# Altium PCB PCB1.PcbDoc
Units mil, origin at the board's own origin, x right, y up, seen from the top; angles counter-clockwise.
Board outline 3149.61 x 3937.01 mil, 2 copper layers (Top Layer, Bottom Layer); 90 components, 52 nets, 276 pads, 678 vias.
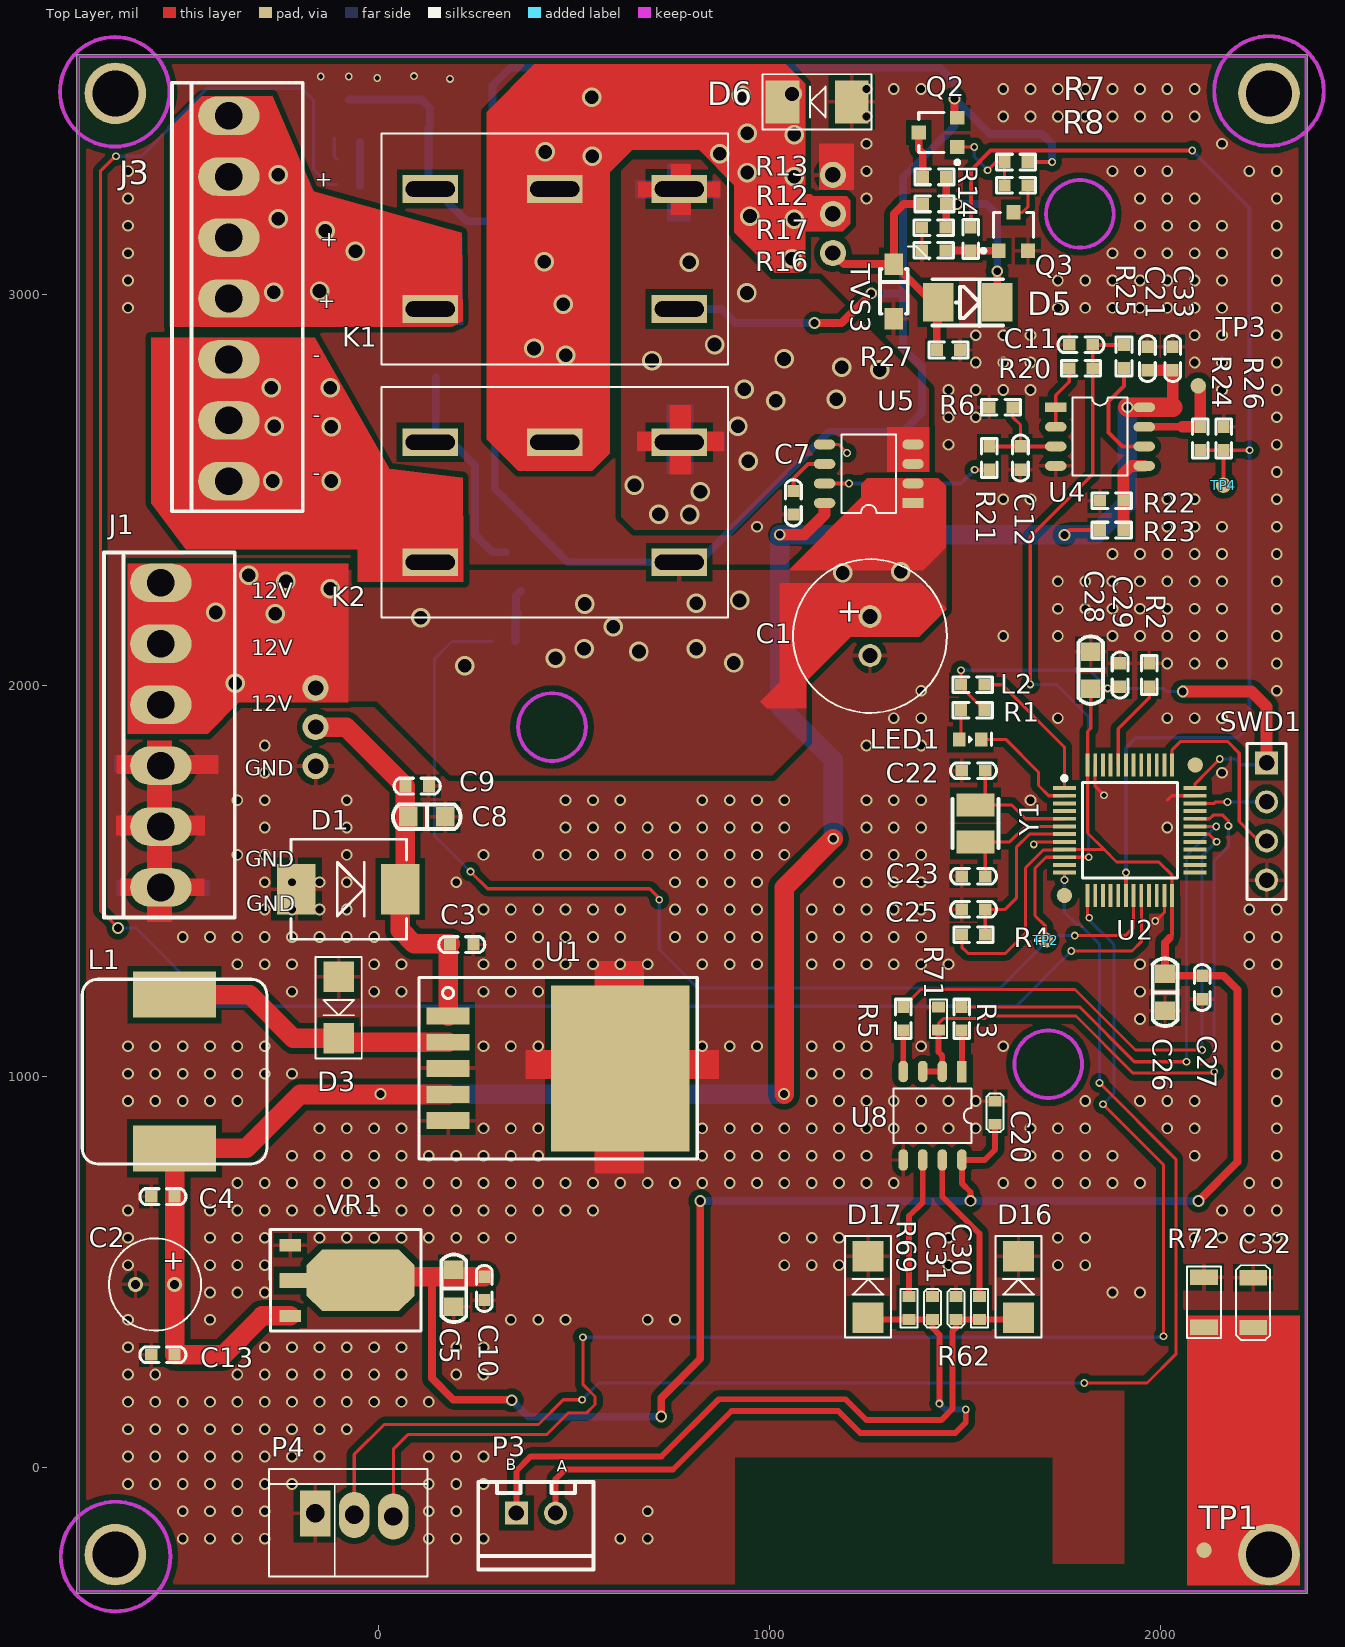
[diagram p0: Top Layer view]
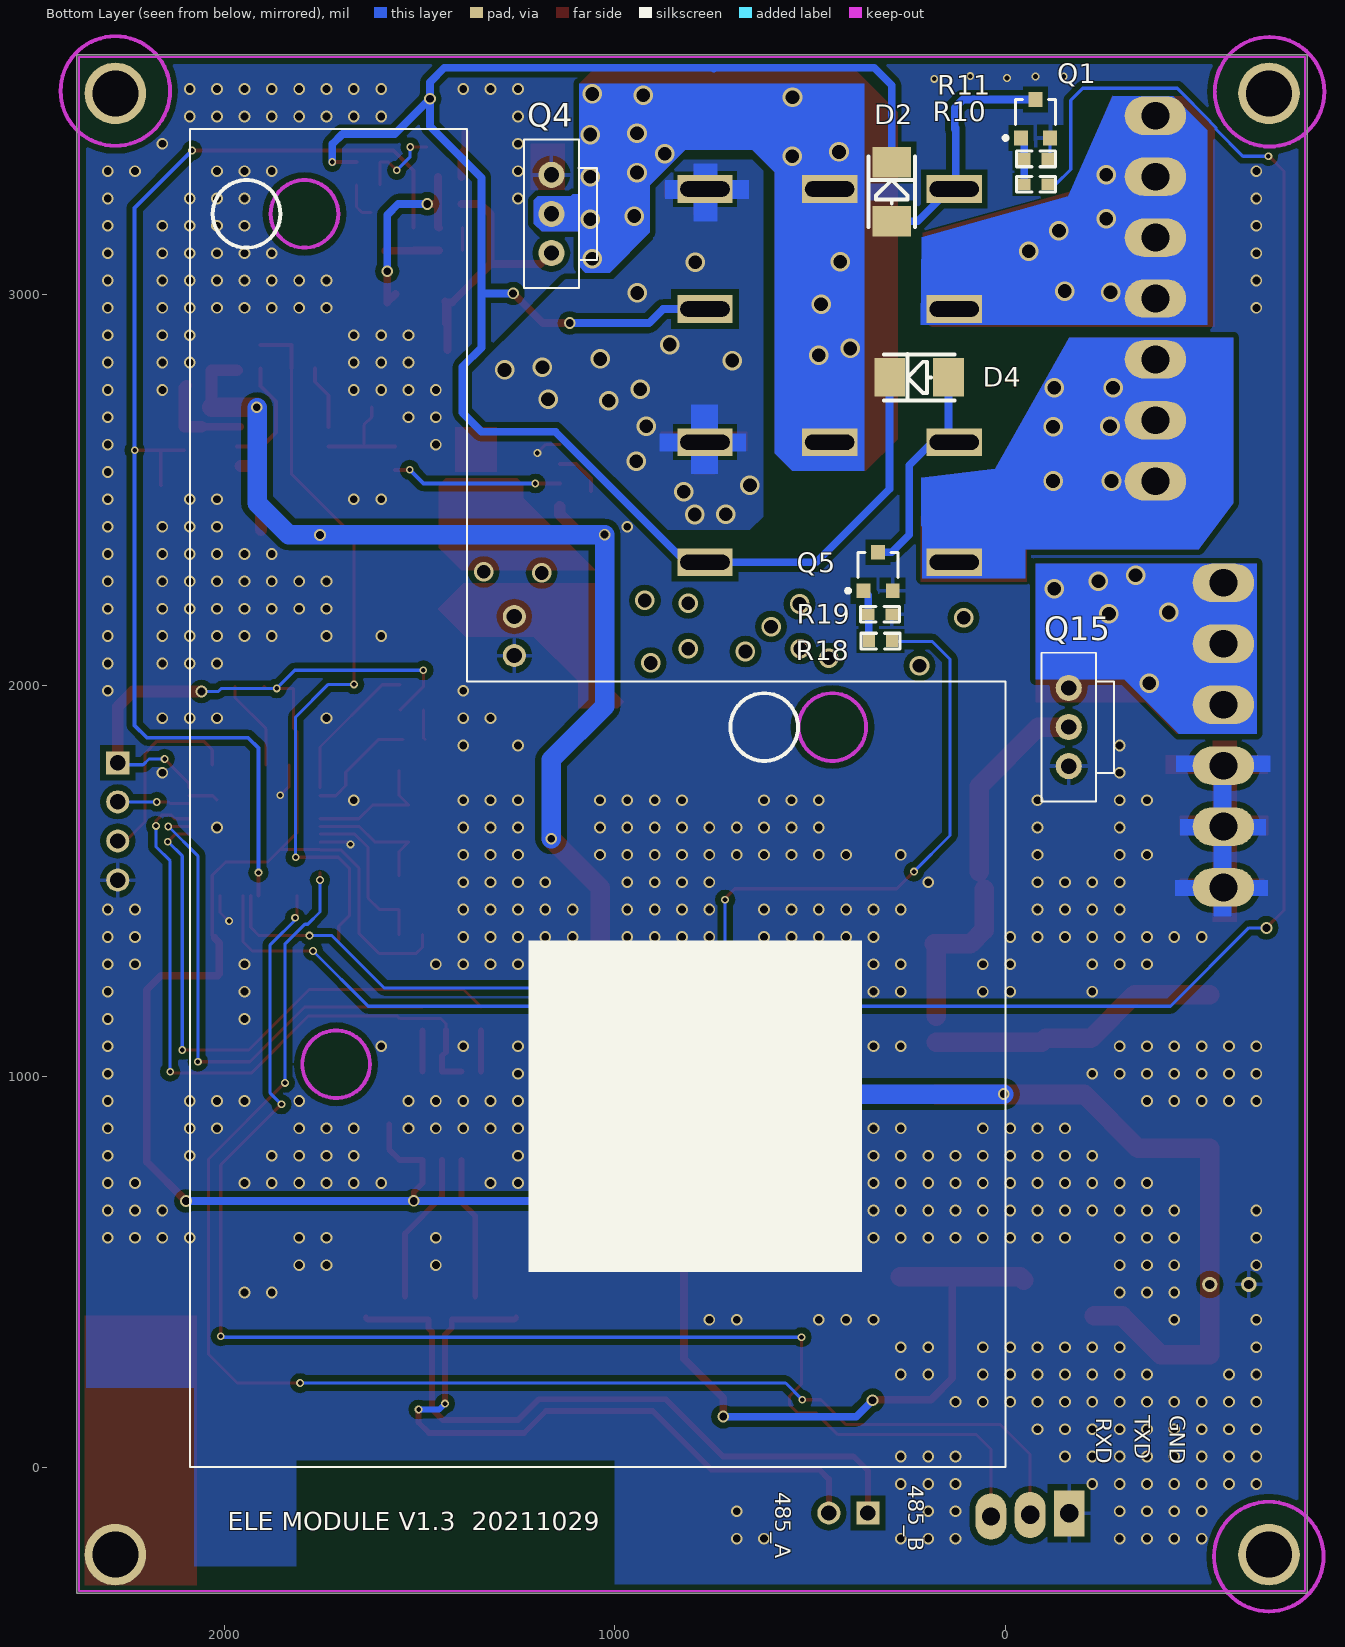
[diagram p1: Bottom Layer view, seen from below]
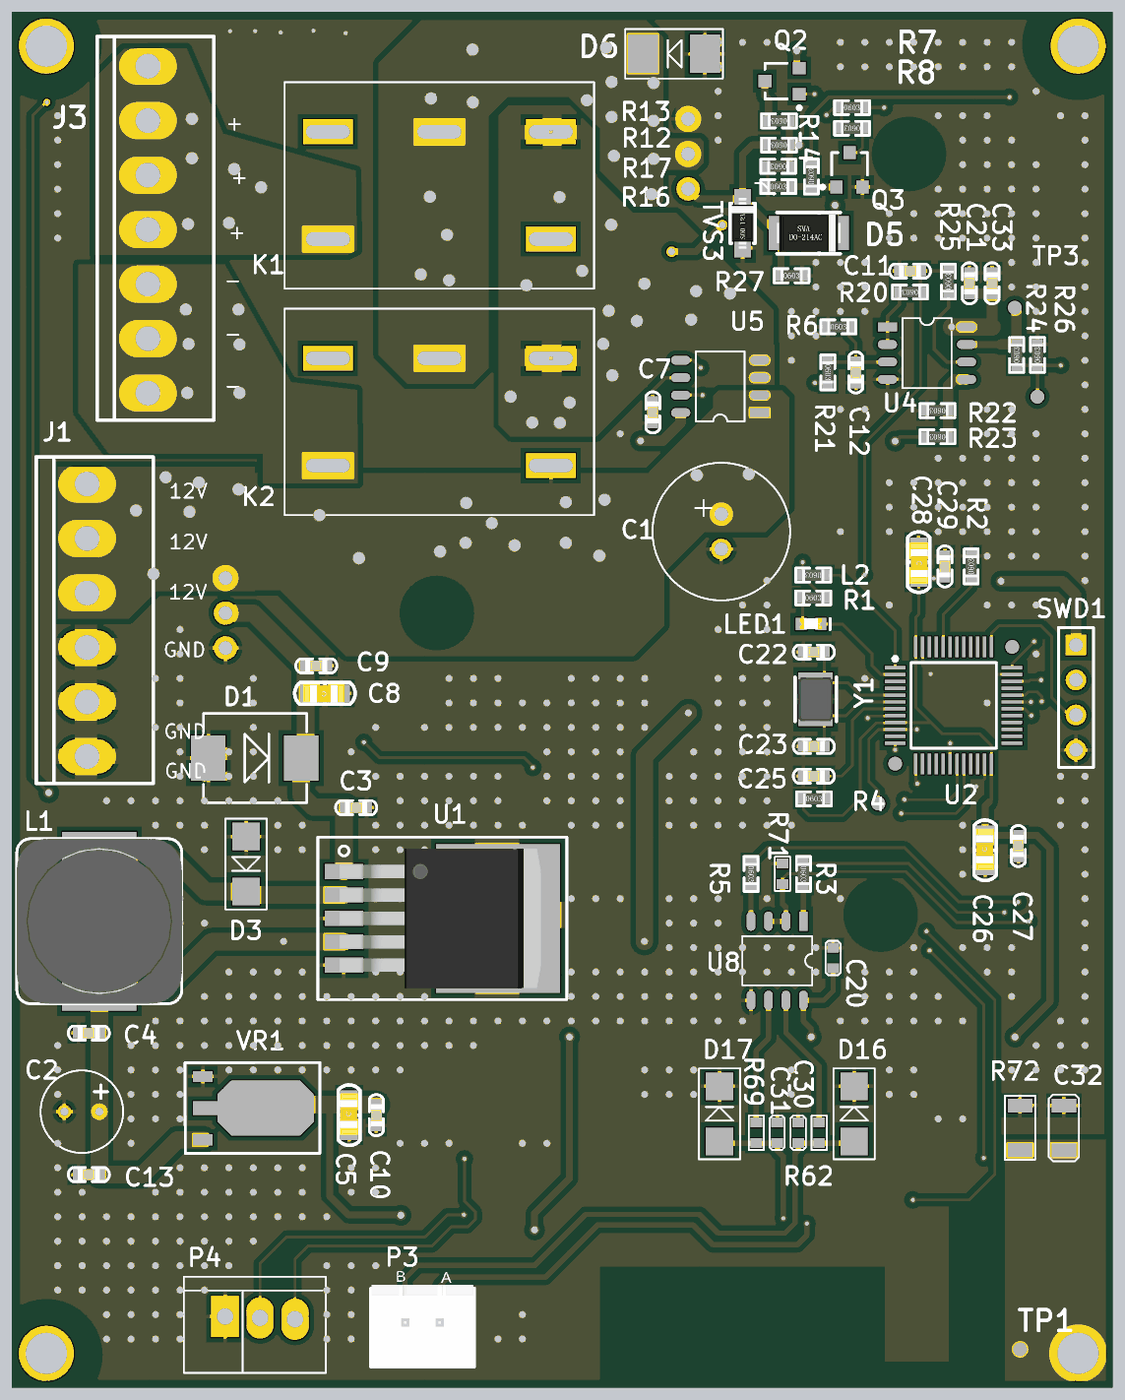
[diagram p2: 3D render of the assembled board from above, using the file's embedded part models]
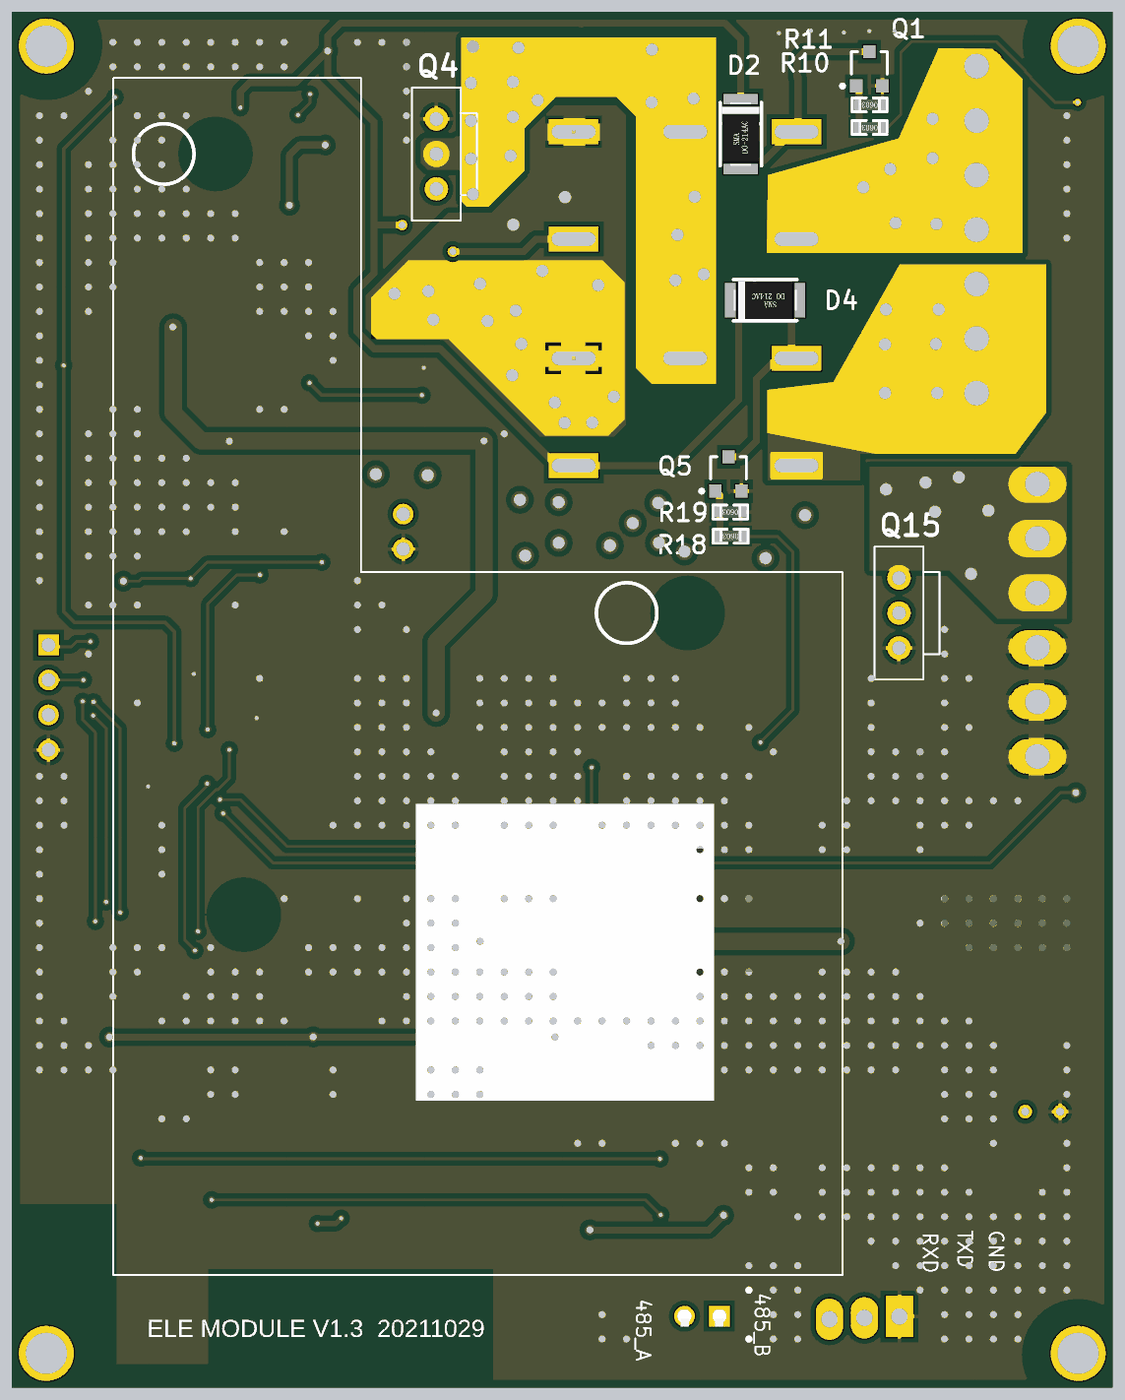
[diagram p3: 3D render of the assembled board from below, using the file's embedded part models]

## Layer stack, top to bottom
Top Solder: solder mask 0.4, Solder Resist, Dk 3.5
Top Layer: signal copper 1.4
Dielectric1: dielectric 12.6, FR-4, Dk 4.8
Bottom Layer: signal copper 1.4
Bottom Solder: solder mask 0.4, Solder Resist, Dk 3.5

## Board outline
-773,-322.62 -773,3614.39 2376.61,3614.39 2376.61,-322.62

## Design rules (kind name [scope] priority, off if disabled: settings)
Clearance gnd [All] p1: gap=15
Clearance [All] p2: gap=10
DiffPairsRouting [All] p1: maxlimit=10 minlimit=10 mostfreqgap=10 toplayer_minwidth=15 toplayer_maxwidth=15 toplayer_prefwidth=15 bottomlayer_minwidth=15 bottomlayer_maxwidth=15 bottomlayer_prefwidth=15 maxuncoupledlength=500
MinimumSolderMaskSliver [All] p1: minsoldermaskwidth=1
PolygonConnect PolygonConnect_1 [isvia] p1: connectstyle=Direct reliefconductorwidth=10 reliefentries=4 polygonreliefangle="90 Angle" airgapwidth=10
PolygonConnect [All] p2: connectstyle=Relief reliefconductorwidth=10 reliefentries=4 polygonreliefangle="90 Angle" airgapwidth=10
RoutingVias [All] p1: holewidth=28 width=50 viastyle="Through Hole" minholewidth=28 minwidth=50 maxholewidth=28 maxwidth=50
SilkToSolderMaskClearance [IsPad] p1: minsilkscreentomaskgap=1 clearancetoexposedcopper=TRUE
SolderMaskExpansion [All] p1: expansion=4
Width [All] p1: maxlimit=500 minlimit=5 preferedwidth=10
27 further rules are at their usual default settings.

## Classes and differential pairs
component class com: C20 C30 C31 C32 D16 D17 P3 P4 R62 R69 R71 R72 TP1 U8
component class 07_EL_CON: C7 C11 C12 C21 C33 C? D2 D4 D5 D6 J3 K1 K2 Q1 Q2 Q3 Q4 Q5 R6 R7 R8 R10 R11 R12 R13 R14 R16 R17 R18 R19 R20 R21 R22 R23 R24 R25 R26 R27 R? TP2 TP3 TP4 TVS3 U4 U5 U?
component class 03_MCU: C22 C23 C25 C26 C27 C28 C29 L2 LED1 R1 R2 R3 R4 R5 SWD1 U2 Y1
component class 02_Power: C1 C2 C3 C4 C5 C8 C9 C10 C13 D1 D3 J1 L1 Q15 U1 VR1
differential pair 485: +485_P -485_N

## Components (designator, comment, footprint, x,y, rotation, side; value= is the part's Value field where it differs from the comment)
C1 "1000uF/35V" 10*16 1257,2127 r90 top
C2 "100uF/35V" 6*8 -573,467.38 r0 top
C3 "104 50V" SMD-0603C 212,1337.38 r180 top
C4 "104 50V" SMD-0603C -553,692.38 r0 top
C5 "10uF 25V" SMD-0805C 192,457.38 r90 top
C7 "104 50V" SMD-0603C 1061,2468 r270 top
C8 "10uF50V" SMD-0805C 122.63,1664.12 r180 top
C9 "104 50V" SMD-0603C 98,1743 r180 top
C10 "104 50V" SMD-0603C 269.68,457.37 r90 top
C11 "NC" SMD-0603C 1797,2872.38 r0 top
C12 "104 50V" SMD-0603C 1642,2582.38 r270 top
C13 "104 50V" SMD-0603C -553,287.38 r0 top
C20 "104 50V" 0603C 1577,877.38 r90 top
C21 "104 50V" SMD-0603C 1967,2837.38 r270 top
C22 "12P 50V" SMD-0603C 1522,1782.38 r180 top
C23 "12P 50V" SMD-0603C 1522,1512.38 r180 top
C25 "104 50V" SMD-0603C 1522,1427.38 r0 top
C26 "10uF 25V" SMD-0805C 2012,1215.13 r90 top
C27 "104 50V" SMD-0603C 2107,1227.38 r90 top
C28 "10uF 25V" SMD-0805C 1822,2039.62 r270 top
C29 "104 50V" SMD-0603C 1897,2027.38 r270 top
C30 "220PF/16V" 0603C 1477,377.38 r90 top
C31 "220PF/16V" 0603C 1417,377.38 r90 top
C32 "1NF/2KV" 1206C 2237.55,485.01 r270 top
C33 "104 50V" SMD-0603C 2032,2837.38 r270 top
D1 "SMCJ24CA" SMC -211,1479 r0 top
D2 "1N4007" DO-214-AC 291,3264 r90 bottom
D3 "SS34" SMA -103,1254.86 r270 top
D4 "1N4007" DO-214-AC 221,2789 r0 bottom
D5 "1N4007" DO-214-AC 1507,2981 r0 top
D6 "SMB24CA" SMB 1210.17,3494 r180 top
D16 "SMAJ6.5CA" SMA 1637,382.38 r90 top
D17 "SMAJ6.5CA" SMA 1252,382.38 r90 top
J1 "HEADER_6" VH-AW-3.96*6P -558,1717.38 r90 top
J3 "Header 7" VH-AW-3.96*7P -384,2757 r90 top
K1 "301-1C-C-D1-24VDC" 301-1C-C-R1-24VDC 769,3271 r180 top
K2 "301-1C-C-D1-24VDC" 301-1C-C-R1-24VDC 769,2623 r180 top
L1 "33uH/5a" CDRH-127 -523,1012.38 r270 top
L2 "MPZ1608D101BTA00" SMD-0603 1519.9,2002.38 r180 top
LED1 "LED G" SMD-0603D 1513.27,1862.85 r0 top
P3 "XH2.54 2P" SIP-2A 402,-117.62 r0 top
P4 "1*3P" 3X2.54MMZ2 -163,-118.69 r0 top
Q1 "LH8050QLT1G" SOT-23 -77,3451 r180 bottom
Q2 "mmbta63l" SOT-23 1431,3416 r90 top
Q3 "mmbta13L" SOT-23 1624,3162 r0 top
Q4 "AOT2502L" to220 1162,3107.38 r90 bottom
Q5 "LH8050QLT1G" SOT-23 326,2292 r180 bottom
Q15 "AOTF4185" to220 -162,1794 r90 bottom
R1 "1K" SMD-0603 1519.9,1937.38 r0 top
R2 "100K" SMD-0603 1972,2027.38 r90 top
R3 "1K" SMD-0603 1492,1147.38 r270 top
R4 "100K" SMD-0603 1522,1362.38 r0 top
R5 "1K" SMD-0603 1342,1147.38 r270 top
R6 "10K" SMD-0603 1592,2712.77 r0 top
R7 "47K" SMD-0603 1631,3340 r0 top
R8 "2K" SMD-0603 1631,3281 r180 top
R10 "2K" SMD-0603 -78,3283 r0 bottom
R11 "5.1K" SMD-0603 -78,3348 r0 bottom
R12 "100" SMD-0603 1422,3233 r180 top
R13 "7.8K" SMD-0603 1422,3302 r180 top
R14 "1K" SMD-0603 1515,3143 r90 top
R16 "10K" SMD-0603 1420,3114 r0 top
R17 "4.7K" SMD-0603 1420,3172 r180 top
R18 "2K" SMD-0603 320,2114 r0 bottom
R19 "5.1K" SMD-0603 321,2183 r0 bottom
R20 "100R" SMD-0603 1797,2812.38 r180 top
R21 "10K" SMD-0603 1562,2582.38 r270 top
R22 "10K" SMD-0603 1875.51,2473.13 r180 top
R23 "21K" SMD-0603 1875.51,2398.13 r180 top
R24 "20K" SMD-0603 2102,2632.38 r90 top
R25 "47K" SMD-0603 1907,2842.38 r90 top
R26 "30K" SMD-0603 2162,2632.38 r90 top
R27 "10K" SMD-0603 1458,2859 r0 top
R62 "8.2R 5%" 0603R 1537,436.43 r270 top
R69 "8.2R 5%" 0603R 1357,436.43 r270 top
R71 "10K" 0603R 1432,1118.32 r90 top
R72 "10M 5%" 1206r 2112,485.33 r270 top
SWD1 "SIP-4 (NC)" SIP-4 2272,1652.38 r270 top
TP1 "TPS" tpd 2112,-212.62 r90 top
TP2 "TPS" tpd 1706.44,1348.79 r0 top
TP3 "TPS" tpd 2097,2767.38 r0 top
TP4 "TPS" tpd 2161.57,2512.8 r0 top
TVS3 "SMF10CA" SOD-123 1318,3009 r90 top
U1 "LM2596S 5.0V" TO-263-5 177,1020.45 r270 top
U2 "GD32F103C8T6" LQFP48 1754.52,1737.97 r0 top
U4 "OPA2376AIDR" SO-8 1732.39,2712.38 r0 top
U5 "ACS712ELCTR-20A-T" SO-8 1367,2467.38 r180 top
U8 "TP8485E-SR" SO-8 1492,1012.38 r270 top
VR1 "LM1117 3.3V" SOT223 -226.94,567.93 r270 top
Y1 "8MHz" XTAL-3225-2 1527,1647.38 r270 top

## Footprints (in the part's own frame and the unit in brackets; to place one, negate y for a bottom-side part, rotate by r counter-clockwise, add the part's x,y. Pads: shape width x height; smd on the part's side, far side on the other; paste and mask are expansions set on the pad)
3X2.54MMZ2 [mm]
  rect 2x3 hole 1.2: 1(0,0)
  oval 2x3 hole 1.2: 2(2.54,-0.1) 3(5.08,-0.2)
  silkscreen extent -3,-4.1 7.31,2.9
6*8 [mm]
  round 1 hole 0.6: 1(1.27,0) 2(-1.27,0)
  silkscreen extent -3,-3 3,3
10*16 [mm]
  round 1.5 hole 1: 1(1.27,0) 2(-1.27,0)
  silkscreen extent -5,-5 5,5
301-1C-C-R1-24VDC [mm]
  rect 3.6x1.8 hole 1 slot 3.2 at 0 deg: 30(16.2,7.8) 85(16.2,0) 86(0,7.8) 87(8.1,0) 88(0,0)
  silkscreen extent -3.15,-3.6 19.35,11.4
0603C [mm]
  rect 0.7x0.85 smd: 1(0,0) 2(1.5,0)
  silkscreen extent -0.5,-0.55 2,0.55
0603R [mm]
  rect 0.7x0.85 smd: 1(0,0) 2(1.5,0)
  silkscreen extent -0.5,-0.55 2,0.55
1206C [mm]
  rect 1x1.8 smd: 1(0,0) 2(3.25,0)
  silkscreen extent -0.8,-1.1 4.05,1.1
1206r [mm]
  rect 1x1.8 smd: 1(0,0) 2(3.25,0)
  silkscreen extent -0.7,-1.1 3.95,1.1
CDRH-127 [mm]
  rect 3x5.4 smd: 1(-5,0) 2(5,0)
  silkscreen extent -6,-6 6,6, body extent -6,-6 6,6, height 8.2
DO-214-AC [mm]
  rect 2x2.5 smd: 1(-1.915,0) 2(1.915,0)
  silkscreen extent -2.3,-1.52 2.3,1.5, body extent -2.3,-1.35 2.3,1.35, height 2.4
LQFP48 [mm]
  round 1 smd: 0(0,-6.985) 0(8.509,1.5)
  rect 1.5x0.25 smd: 1(0,0) 2(0,-0.5) 3(0,-1) 4(0,-1.5) 5(0,-2) 6(0,-2.5) 7(0,-3) 8(0,-3.5) 9(0,-4) 10(0,-4.5) 11(0,-5) 12(0,-5.5) 25(8.495,-5.5) 26(8.495,-5) 27(8.495,-4.5) 28(8.495,-4) 29(8.495,-3.5) 30(8.495,-3) 31(8.495,-2.5) 32(8.495,-2) 33(8.495,-1.5) 34(8.495,-1) 35(8.495,-0.5) 36(8.495,0)
  rect 0.25x1.5 smd: 13(1.5,-7) 14(2,-7) 15(2.5,-7) 16(3,-7) 17(3.5,-7) 18(4,-7) 19(4.5,-7) 20(5,-7) 21(5.5,-7) 22(6,-7) 23(6.5,-7) 24(7,-7) 37(7,1.5) 38(6.5,1.5) 39(6,1.5) 40(5.5,1.5) 41(5,1.5) 42(4.5,1.5) 43(4,1.5) 44(3.5,1.5) 45(3,1.5) 46(2.5,1.5) 47(2,1.5) 48(1.5,1.5)
  silkscreen extent -0.13,-5.86 7.35,0.76
SIP-2A [mm]
  rect 1.5x1.5 hole 1: 1(-1.27,0)
  round 1.5 hole 1: 2(1.27,0)
  silkscreen extent -3.75,-3.68 3.75,2.02, body extent -3.7,-3.81 3.7,2.29, height 7.5
SIP-4 [mm]
  rect 1.5x1.5 hole 1: 1(-3.81,0)
  round 1.5 hole 1: 2(-1.27,0) 3(1.27,0) 4(3.81,0)
  silkscreen extent -5.08,-1.27 5.08,1.27
SMA [mm]
  rect 2x2 smd: 1(0,0) 2(4,0)
  silkscreen extent -1.3,-1.5 5.3,1.5
SMB [mm]
  rect 2.2x2.8 smd: 1(0,0) 2(4.5,0)
  silkscreen extent -1.3,-1.8 5.8,1.8
SMC [mm]
  rect 2.5x3.3 smd: 1(0,0) 2(6.75,0)
  silkscreen extent -0.35,-3.25 7.15,3.25
SMD-0603 [mil]
  rect 31.5x30 smd: 1(-30,0) 2(30,0)
  silkscreen extent -50,-20 50,20, body extent -31,-16 31,16, height 18
SMD-0603C [mil]
  rect 31.5x30 smd: 1(-30,0) 2(30,0)
  silkscreen extent -59,-20 59,20, body extent -32,-16 32,16, height 31
SMD-0603D [mm]
  rect 0.8x0.9 smd: 1(-0.7,-0.012) 2(0.73,-0.012)
  silkscreen extent -0.08,-0.41 1.4,0.39, body extent -0.8,-0.39 0.8,0.41, height 0.6
SMD-0805C [mm]
  rect 1.2x1.27 smd: 1(-1.2,0) 2(1.2,0)
  silkscreen extent -2.2,-0.8 2.2,0.8, body extent -1.42,-0.67 1.58,0.73, height 0.93
SO-8 [mil]
  rect 55x25 smd: 1(0,0)
  oval 55x25 smd: 2(0,-50) 3(0,-100) 4(0,-150) 5(226.38,-150) 6(226.38,-100) 7(226.38,-50) 8(226.38,0)
  silkscreen extent 43,-175 183,25
SOD-123 [mm]
  rect 1.4x1.2 smd: 1(-1.778,0) 2(1.778,0)
  silkscreen extent -1.45,-0.9 1.45,0.9, body extent -1.85,-0.8 1.85,0.8, height 1.2
SOT223 [mm]
  rect 0.8x1.4 smd: 1(0,0) 3(4.6,0)
  rect 1x1.854 smd: 2(2.3,0.227)
  oct 4x7 smd: 4(2.286,4.572)
  silkscreen extent -1.02,-1.3 5.59,8.51
SOT-23 [mm] "SOT-23; 3 Leads; Body 3.0 x 2.6 mm, inc. leads (LxW max)"
  rect 0.9x0.95 smd: 1(-0.95,-1.25) 2(0.95,-1.25) 3(0,1.25)
  silkscreen extent -2.08,-1.37 1.3,1.25
to220 [mm]
  round 1.7 hole 1: 1(0,0) 2(2.54,0) 3(5.08,0)
  silkscreen extent -2.29,-2.95 7.37,1.78
TO-263-5 [mm]
  rect 1.1x2.8 smd: 1(-3.4,0) 2(-1.7,0) 3(0,0) 4(1.7,0) 5(3.4,0)
  rect 10.8x9 smd: 6(0,11.2)
  silkscreen extent -5.9,-1.9 5.9,16.2, body extent -5.08,-0.32 5.08,14.32, height 4.57
tpd [mm]
  round 1 smd: 1(0,0)
VH-AW-3.96*6P [mm]
  oval 2.5x4 hole 1.8: 1(-5.94,0) 2(-1.98,0) 3(1.98,0) 4(5.94,0) 5(9.9,0) 6(13.86,0)
  silkscreen extent -7.89,-4.8 15.82,3.7
VH-AW-3.96*7P [mm]
  oval 2.5x4 hole 1.8: 1(-5.94,0) 2(-1.98,0) 3(1.98,0) 4(5.94,0) 5(9.9,0) 6(13.86,0) 7(17.82,0)
  silkscreen extent -7.89,-4.8 19.96,3.7
XTAL-3225-2 [mm]
  rect 1.5x2.5 smd: 1(-1.2,0) 2(1.2,0)
  silkscreen extent -1.6,-1.5 1.6,1.5, body extent -1.6,-1.25 1.6,1.25, height 0.9

## Part data
C1 C2: library part CAP2, "电解电容"
C3 C4 C8 C9 C10 C11 C12 C13: library part CAP4, "贴片电容 10%"
C5 C21 C25 C26 C27 C28 C29 C33: library part CAP4, "贴片电容 20%"
C7: library part C, "贴片电容 10%"
C20 C30 C31 C32: library part CAP
C22 C23: library part CAP4, "贴片电容 5%"
D1 D3 D6: library part DIODE
D2 D4 D5: library part DIODE2, "贴片二极管"
D16 D17: library part D_ESD
J3: "Header, 7-Pin"
K1 K2: library part JDQ1, "5V 继电器"
L1: library part IND
L2: library part CIZHU1, "磁珠电感 100R 100MHz"
LED1: library part LED, "绿色普亮"
P3: library part SIP-2, "XH2.54 2P 直插"
P4: library part HDR1*3
Q1 Q3 Q5: library part NPN-1, "三极管"
Q2: library part PNP, "PNP"
Q4: library part SI7860
Q15: library part "MOSFET N", "MOSFET N"
R1 R20: library part RES0, "贴片电阻 5%"
R2 R3 R4 R5 R10 R11 R18 R19: library part RES2, "贴片电阻 5%"
R6 R21: library part RES0, "贴片电阻 1%"
R7 R8 R12 R13 R14 R16 R17 R22 R23 R24 R25 R26 R27: library part RES-SOP, "贴片电阻 5%"
R62 R69 R71 R72: library part RES
SWD1: library part SIP-4, "ISP 下载"
TVS3: library part TVS-1, "TVS 10V"
U1: library part LM2596
U2: library part STM32F103C6
U4: library part LM358, "运算放大器"
U5: library part ACS712, "HALL 20A 电流传感器"
VR1: library part LM1117, "三端稳压器"
Y1: library part XTAL, "3225 贴片晶振"

## Free pads (board coordinates)
  round 157.48 hole 118.11: 0(-674.57,-224.2) 0(-674.57,3515.96) 0(2278.18,-224.2) 0(2278.18,3515.96)

## Via types
v1: diameter 30, hole 20, Top Layer to Bottom Layer, tented both sides, 568 vias
v2: diameter 50, hole 35, Top Layer to Bottom Layer, tented both sides, 64 vias
v3: diameter 20, hole 12, Top Layer to Bottom Layer, tented both sides, 43 vias
v4: diameter 30, hole 20, Top Layer to Bottom Layer, 2 vias
v5: diameter 20, hole 12, Top Layer to Bottom Layer, 1 vias

## Nets (pads, with @x,y where several pads share a name; then routed paths per layer and width w, separated by ;. In a path a pad name is that pad's centre, name@x,y a point inside that pad or via, vN(x,y) a via of type N, cw(c..) or ccw(c..) an arc to the next point about the centre after c; other vN are vias at no path point)
485_N: C30.1 D16.1 P3.1 R62.2 | length 1733.4
  Top Layer w15: P3.1@352,-122.62 P3.1 352,-37.62 352,-9.44 388.82,27.38 723.35,27.38 869.62,173.65 1194.35,173.65 1248,120 1439,120 1468,149 1468,347.1 1477,356.1 C30.1 R62.2 1632,377.38 D16.1
485_P: C31.1 D17.1 P3.2 R69.2 | length 1748.6
  Top Layer w15: P3.2@452,-126.56 P3.2 452,-52.62 452,-30.97 476.58,-6.39 752.97,-6.39 902.58,143.22 1175.78,143.22 1232,87 1475,87 1502,114 v3(1502,147.38) ; D17.1 1257,377.38 R69.2 C31.1 1417,356.1 1434.5,338.6 v3(1434.5,162.38)
  Bottom Layer w15: v3(1434.5,162.38) 1449.5,147.38 v3(1502,147.38)
ELE_PWM: R14.2 R24.1 R26.1 TP4.1 U2.18 | length 3228.3
  Top Layer w10: R14.2 1515,3319 1565.85,3369.85 1622,3369.85 ; 1594.76,3369.85 1622,3369.85 ; U2.18 v3(1912,1521.35) ; v3(2081.65,3369.85) 1622,3369.85 ; R24.1 R26.1 ; TP4.1 2162,2513.23 R26.1 ; v3(2228.64,2602.38) R26.1
  Bottom Layer w10: v3(1912,1521.35) 1912,1840.28 1938.26,1866.53 2196.82,1866.53 2228.64,1898.36 v3(2228.64,2602.38) 2228.64,3222.85 v3(2081.65,3369.85)
EN1_485: R71.1 U2.32 U8.2 U8.3 | length 1705
  Top Layer w8: R71.1 1432,1135.05 1444.58,1147.63 1512.8,1147.63 1512.89,1147.72 1550,1147.72 1556.66,1154.38 1784.1,1154.38 1930.1,1008.38 2134.44,1008.38 v3(2137.85,1011.8) ; U2.32 2125.8,1659.23 2135.14,1668.56 2159.83,1668.56 2174.15,1654.24 v3(2174.15,1641.05)
  Top Layer w15: U8.3 U8.2 1442,1052.38 1432,1062.38 R71.1
  Bottom Layer w8: v3(2137.85,1011.8) 2137.85,1551.39 2174.15,1587.69 v3(2174.15,1641.05)
GND: C1.2 C2.2 C3.1 C4.1 C5.1 C7.2 C8.1 C9.1 C10.1 C11.1 C12.2 C13.1 C20.2 C21.1 C22.2 C23.2 C25.1 C26.1 C27.1 C28.1 C29.1 C30.2 C31.2 C32.1 C33.1 D1.1 D3.1 D6.1 D16.2 D17.2 J1.1 J1.2 J1.3 P4.1 Q1.2 Q3.2 Q4.3 Q5.2 Q15.1 R2.2 R6.1 R11.1 R16.1 R17.2 R19.1 R22.2 R26.2 R27.2 R71.2 R72.1 SWD1.4 TVS3.1 U1.3 U1.5 U1.6 U2.8 U2.23 U2.35 U2.47 U4.4 U5.5 U8.5 VR1.1 | length 504.6
  Top Layer w8: U5.5 1176.31,2617.38 v3@1200.15,2593.54 ; R16.1 R17.2 ; v3@1675.63,1593.22 1681.83,1599.41 1753.76,1599.41 U2.8 ; U2.47 1833.26,1742.4 v3(1856.04,1719.62) ; v3@1987,1395.88 2010.43,1419.3 U2.23 ; 2017.78,1706.86 2029.2,1718.28 U2.35
  Bottom Layer w8: Q1.2 -114.4,3354.4 R11.1
  other v1: -502.22,-183.14 -432.22,-183.14 -362.22,-183.14 -292.22,-183.14 127.78,-183.14 197.78,-183.14 267.78,-183.14 617.78,-183.14 687.78,-183.14 -502.22,-113.14 -432.22,-113.14 -362.22,-113.14 -292.22,-113.14 127.78,-113.14 197.78,-113.14 687.78,-113.14 -642.22,-43.14 -572.22,-43.14 -502.22,-43.14 -432.22,-43.14 -362.22,-43.14 -292.22,-43.14 -222.22,-43.14 127.78,-43.14 197.78,-43.14 267.78,-43.14 -642.22,26.86 -572.22,26.86 -502.22,26.86 -432.22,26.86 -362.22,26.86 -292.22,26.86 -222.22,26.86 -152.22,26.86 127.78,26.86 197.78,26.86 267.78,26.86 -642.22,96.86 -572.22,96.86 -502.22,96.86 -432.22,96.86 -362.22,96.86 -292.22,96.86 -222.22,96.86 -152.22,96.86 -82.22,96.86 -642.22,166.86 -572.22,166.86 -502.22,166.86 -432.22,166.86 -362.22,166.86 -292.22,166.86 -222.22,166.86 -152.22,166.86 -82.22,166.86 -12.22,166.86 57.78,166.86 127.78,166.86 -642.22,236.86 -572.22,236.86 -362.22,236.86 -292.22,236.86 -222.22,236.86 -152.22,236.86 -82.22,236.86 -12.22,236.86 57.78,236.86 197.78,236.86 267.78,236.86 -642.22,306.86 -292.22,306.86 -222.22,306.86 -152.22,306.86 -82.22,306.86 -12.22,306.86 57.78,306.86 197.78,306.86 267.78,306.86 -642.22,376.86 -432.22,376.86 337.78,376.86 407.78,376.86 477.78,376.86 687.78,376.86 757.78,376.86 -432.22,446.86 -362.22,446.86 -292.22,446.86 1877.78,446.86 1947.78,446.86 -642.22,516.86 -432.22,516.86 -362.22,516.86 -292.22,516.86 1037.78,516.86 1107.78,516.86 1177.78,516.86 1457.78,516.86 1737.78,516.86 1807.78,516.86 -642.22,586.86 -432.22,586.86 -362.22,586.86 -292.22,586.86 -152.22,586.86 -82.22,586.86 -12.22,586.86 57.78,586.86 127.78,586.86 197.78,586.86 267.78,586.86 337.78,586.86 1037.78,586.86 1107.78,586.86 1177.78,586.86 1457.78,586.86 1737.78,586.86 1807.78,586.86 2087.78,586.86 2157.78,586.86 2227.78,586.86 2297.78,586.86 -642.22,656.86 -432.22,656.86 -362.22,656.86 -292.22,656.86 -222.22,656.86 -152.22,656.86 -82.22,656.86 -12.22,656.86 57.78,656.86 127.78,656.86 197.78,656.86 267.78,656.86 337.78,656.86 407.78,656.86 477.78,656.86 547.78,656.86 2157.78,656.86 2227.78,656.86 2297.78,656.86 -362.22,726.86 -292.22,726.86 -222.22,726.86 -152.22,726.86 -82.22,726.86 -12.22,726.86 57.78,726.86 127.78,726.86 197.78,726.86 267.78,726.86 337.78,726.86 407.78,726.86 477.78,726.86 547.78,726.86 617.78,726.86 687.78,726.86 757.78,726.86 827.78,726.86 897.78,726.86 967.78,726.86 1037.78,726.86 1107.78,726.86 1177.78,726.86 1247.78,726.86 1317.78,726.86 1597.78,726.86 1667.78,726.86 1737.78,726.86 1807.78,726.86 1877.78,726.86 1947.78,726.86 2227.78,726.86 2297.78,726.86 -222.22,796.86 -152.22,796.86 -82.22,796.86 -12.22,796.86 57.78,796.86 127.78,796.86 197.78,796.86 267.78,796.86 337.78,796.86 407.78,796.86 827.78,796.86 897.78,796.86 967.78,796.86 1037.78,796.86 1107.78,796.86 1177.78,796.86 1247.78,796.86 1667.78,796.86 1737.78,796.86 1807.78,796.86 1877.78,796.86 2087.78,796.86 2297.78,796.86 -152.22,866.86 -82.22,866.86 -12.22,866.86 57.78,866.86 267.78,866.86 337.78,866.86 407.78,866.86 827.78,866.86 897.78,866.86 967.78,866.86 1037.78,866.86 1107.78,866.86 1177.78,866.86 1247.78,866.86 1317.78,866.86 1387.78,866.86 1457.78,866.86 1527.78,866.86 1667.78,866.86 1737.78,866.86 1807.78,866.86 2017.78,866.86 2087.78,866.86 2297.78,866.86 -642.22,936.86 -572.22,936.86 -502.22,936.86 -432.22,936.86 -362.22,936.86 1107.78,936.86 1177.78,936.86 1247.78,936.86 1317.78,936.86 1387.78,936.86 1457.78,936.86 1527.78,936.86 1807.78,936.86 1947.78,936.86 2017.78,936.86 2087.78,936.86 2297.78,936.86 -642.22,1006.86 -572.22,1006.86 -502.22,1006.86 -432.22,1006.86 -362.22,1006.86 -292.22,1006.86 -222.22,1006.86 1107.78,1006.86 1177.78,1006.86 1247.78,1006.86 2297.78,1006.86 -642.22,1076.86 -572.22,1076.86 -502.22,1076.86 -432.22,1076.86 -362.22,1076.86 -292.22,1076.86 267.78,1076.86 337.78,1076.86 407.78,1076.86 827.78,1076.86 897.78,1076.86 967.78,1076.86 1107.78,1076.86 1177.78,1076.86 1247.78,1076.86 1387.78,1076.86 1597.78,1076.86 2297.78,1076.86 1947.78,1146.86 2297.78,1146.86 -222.22,1216.86 -12.22,1216.86 57.78,1216.86 267.78,1216.86 337.78,1216.86 407.78,1216.86 1947.78,1216.86 2297.78,1216.86 -362.22,1286.86 -292.22,1286.86 -222.22,1286.86 -12.22,1286.86 57.78,1286.86 267.78,1286.86 337.78,1286.86 407.78,1286.86 477.78,1286.86 547.78,1286.86 617.78,1286.86 687.78,1286.86 827.78,1286.86 897.78,1286.86 967.78,1286.86 1107.78,1286.86 1177.78,1286.86 1247.78,1286.86 1317.78,1286.86 1387.78,1286.86 1457.78,1286.86 1947.78,1286.86 2227.78,1286.86 2297.78,1286.86 -502.22,1356.86 -432.22,1356.86 -362.22,1356.86 -292.22,1356.86 -222.22,1356.86 -152.22,1356.86 -82.22,1356.86 -12.22,1356.86 337.78,1356.86 407.78,1356.86 477.78,1356.86 547.78,1356.86 617.78,1356.86 757.78,1356.86 827.78,1356.86 897.78,1356.86 967.78,1356.86 1107.78,1356.86 1177.78,1356.86 1247.78,1356.86 1317.78,1356.86 1387.78,1356.86 2227.78,1356.86 2297.78,1356.86 -292.22,1426.86 -222.22,1426.86 -152.22,1426.86 -82.22,1426.86 267.78,1426.86 337.78,1426.86 407.78,1426.86 477.78,1426.86 547.78,1426.86 617.78,1426.86 757.78,1426.86 827.78,1426.86 897.78,1426.86 967.78,1426.86 1107.78,1426.86 1177.78,1426.86 1247.78,1426.86 1317.78,1426.86 1387.78,1426.86 2227.78,1426.86 2297.78,1426.86 -292.22,1496.86 -222.22,1496.86 -152.22,1496.86 -82.22,1496.86 197.78,1496.86 757.78,1496.86 827.78,1496.86 897.78,1496.86 967.78,1496.86 1177.78,1496.86 1247.78,1496.86 1317.78,1496.86 1387.78,1496.86 -362.22,1566.86 -292.22,1566.86 -82.22,1566.86 267.78,1566.86 407.78,1566.86 477.78,1566.86 547.78,1566.86 617.78,1566.86 687.78,1566.86 757.78,1566.86 827.78,1566.86 897.78,1566.86 967.78,1566.86 1037.78,1566.86 1247.78,1566.86 1317.78,1566.86 1387.78,1566.86 -292.22,1636.86 -82.22,1636.86 477.78,1636.86 547.78,1636.86 617.78,1636.86 687.78,1636.86 757.78,1636.86 827.78,1636.86 897.78,1636.86 967.78,1636.86 1037.78,1636.86 1247.78,1636.86 1317.78,1636.86 1387.78,1636.86 2017.78,1636.86 -362.22,1706.86 -292.22,1706.86 -82.22,1706.86 477.78,1706.86 547.78,1706.86 617.78,1706.86 827.78,1706.86 897.78,1706.86 967.78,1706.86 1037.78,1706.86 1247.78,1706.86 1317.78,1706.86 1387.78,1706.86 1667.78,1706.86 -292.22,1776.86 2157.78,1776.86 -292.22,1846.86 1247.78,1846.86 1387.78,1846.86 1317.78,1916.86 1387.78,1916.86 1737.78,1916.86 2017.78,1916.86 2087.78,1916.86 2157.78,1916.86 1387.78,1986.86 2297.78,1986.86 2017.78,2056.86 2087.78,2056.86 2157.78,2056.86 2297.78,2056.86 1597.78,2126.86 1737.78,2126.86 1877.78,2126.86 1947.78,2126.86 2017.78,2126.86 2087.78,2126.86 2157.78,2126.86 2297.78,2126.86 1737.78,2196.86 1807.78,2196.86 1877.78,2196.86 1947.78,2196.86 2017.78,2196.86 2087.78,2196.86 2157.78,2196.86 2297.78,2196.86 1737.78,2266.86 1807.78,2266.86 1877.78,2266.86 1947.78,2266.86 2017.78,2266.86 2087.78,2266.86 2157.78,2266.86 2297.78,2266.86 1877.78,2336.86 1947.78,2336.86 2017.78,2336.86 2087.78,2336.86 2157.78,2336.86 2297.78,2336.86 967.78,2406.86 2017.78,2406.86 2087.78,2406.86 2157.78,2406.86 2297.78,2406.86 1597.78,2476.86 1667.78,2476.86 2017.78,2476.86 2087.78,2476.86 2297.78,2476.86 2297.78,2546.86 1457.78,2616.86 2297.78,2616.86 1457.78,2686.86 1527.78,2686.86 2297.78,2686.86 1457.78,2756.86 1527.78,2756.86 1597.78,2756.86 1667.78,2756.86 2157.78,2756.86 2297.78,2756.86 1527.78,2826.86 1597.78,2826.86 1667.78,2826.86 2087.78,2826.86 2157.78,2826.86 2297.78,2826.86 1527.78,2896.86 1597.78,2896.86 1667.78,2896.86 2087.78,2896.86 2157.78,2896.86 2297.78,2896.86 -642.22,2966.86 1737.78,2966.86 1807.78,2966.86 1877.78,2966.86 1947.78,2966.86 2017.78,2966.86 2087.78,2966.86 2157.78,2966.86 2297.78,2966.86 -642.22,3036.86 1737.78,3036.86 1807.78,3036.86 1877.78,3036.86 1947.78,3036.86 2017.78,3036.86 2087.78,3036.86 2157.78,3036.86 2297.78,3036.86 -642.22,3106.86 1877.78,3106.86 1947.78,3106.86 2017.78,3106.86 2087.78,3106.86 2157.78,3106.86 2297.78,3106.86 -642.22,3176.86 1947.78,3176.86 2017.78,3176.86 2087.78,3176.86 2157.78,3176.86 2297.78,3176.86 -642.22,3246.86 1247.78,3246.86 1947.78,3246.86 2017.78,3246.86 2087.78,3246.86 2297.78,3246.86 -642.22,3316.86 1247.78,3316.86 1877.78,3316.86 1947.78,3316.86 2017.78,3316.86 2227.78,3316.86 2297.78,3316.86 1247.78,3386.86 2157.78,3386.86 1247.78,3456.86 1597.78,3456.86 1667.78,3456.86 1737.78,3456.86 1807.78,3456.86 1877.78,3456.86 1947.78,3456.86 2017.78,3456.86 2087.78,3456.86 1247.78,3526.86 1317.78,3526.86 1387.78,3526.86 1597.78,3526.86 1667.78,3526.86 1737.78,3526.86 1807.78,3526.86 1877.78,3526.86 1947.78,3526.86 2017.78,3526.86 2087.78,3526.86
  other v3: 1987,1397.75 1676.14,1593.73 1198.05,2595.64 182,3553 -4,3555 -149,3559 -77,3559 90,3560
LED1: LED1.2 U2.2 | length 292.1
  Top Layer w8: LED1.2 1604.23,1862.38 1688.37,1778.24 1688.37,1744.26 1714.35,1718.28 U2.2
NetC7_1: C7.1 U5.6 | length 127
  Top Layer w10: C7.1 1061,2529.86 1098.52,2567.38 U5.6
NetC11_2: C11.2 R20.1 R25.2 TP2.1 U2.10 | length 1902.5
  Top Layer w8: v3(1667.15,2003.25) 1667.15,2381.29 1827,2541.14 R20.1 ; TP2.1 1706.44,1384.06 1679.17,1411.32 1679.17,1532.61 1707.36,1560.8 U2.10 v3(1816.6,1560.8)
  Top Layer w10: R20.1 C11.2 R25.2
  Bottom Layer w8: v3(1667.15,2003.25) 1732.97,2003.25 1816.6,1919.62 v3(1816.6,1560.8)
NetC12_1: C12.1 R6.2 R21.1 U4.3 | length 279.1
  Top Layer w8: R6.2 1622,2687.38 1642,2667.38 C12.1
  Top Layer w10: R21.1 C12.1 U4.3
NetC22_1: C22.1 U2.5 Y1.1 | length 340.3
  Top Layer w8: C22.1 1552,1719.62 Y1.1 1619.37,1694.62 1654.76,1659.23 U2.5
NetC23_1: C23.1 U2.6 Y1.2 | length 342
  Top Layer w8: C23.1 1552,1575.13 Y1.2 1614.31,1600.13 1653.72,1639.54 U2.6
NetC32_2: C32.2 pad.0@2278.18,-224.2 R72.2 TP1.1
NetD2_1: D2.1 K1.85 Q1.3 | length 616
  Bottom Layer w20: Q1.3 108.79,3500.21 130,3479 130,3425 ; 127.2,3428 127.2,3285.8 224.39,3188.61 D2.1
NetD3_2: D3.2 L1.1 U1.2 | length 750.5
  Top Layer w50: L1.1 -330.56,1209.23 -218.71,1097.38 D3.2 -93,1087.38 U1.2
NetD4_1: D4.1 K2.85 Q5.3 | length 567.4
  Bottom Layer w20: K2.85 187,2623 246,2564 246,2386 290.79,2341.21 Q5.3 ; K2.85@145.61,2637.4 D4.1
NetD5_1: D5.1 Q4.1 R12.2 R27.1 TVS3.2 | length 726.4
  Top Layer w20: Q4.1 1190.38,3079 TVS3.2 ; R12.2 1344,3233 1318,3207 TVS3.2 ; R27.1@1428,2870.07 R27.1 1428,2977.39 D5.1 ; 1431.61,2927.25 D5.1 ; D5.1@1434,2983.39 D5.1 ; TVS3.2 1416,2981 D5.1
NetD5_2: D5.2 R12.1 R13.1 R17.1 | length 526.8
  Top Layer w20: R17.1 1452,3174 R12.1 ; R13.1 R12.1 ; v1(1480,3233) R12.1 ; D5.2@1561,3002.39 D5.2 v1(1582.39,3060.61)
  Bottom Layer w20: v1(1480,3233) 1554,3233 1582.39,3204.61 v1(1582.39,3060.61)
NetD6_2: D6.2 K1.87 K2.87 Q4.2
  other v2: 478,2846 397,2863 472,2976 423,3085 1057.34,3092.38 1063.05,3193.39 949.71,3201.96 1063.05,3302.38 943.04,3313.28 546,3355 872,3361 426,3366 1063.05,3410.56 943.04,3413.42 545,3506 927,3511.29 1057.34,3514.38
NetJ3_1: J3.1 J3.2 J3.3 K2.30
  other v2: -271.39,2523.79 -121.85,2523.79 -121.85,2662.38 -267.58,2663.81 -275.47,2762.38 -124.7,2762.38
NetJ3_4: J3.4 J3.5 J3.6 J3.7 K1.30
  other v2: -269,3007 -152,3010 -60,3112 -137,3164 -258,3195 -258,3308
NetL2_1: L2.1 U2.1 | length 375.7
  Top Layer w8: L2.1 1595.24,2002.38 1754.52,1843.1 U2.1
NetLED1_1: LED1.1 R1.1 | length 76.7
  Top Layer w8: LED1.1 1489.9,1866.57 R1.1
NetQ1_1: Q1.1 R10.2 R11.2 | length 113
  Bottom Layer w20: R10.2@-48,3278 R10.2 R11.2 Q1.1@-48,3391
NetQ2_1: Q2.1 R7.1 R8.2 | length 227.9
  Top Layer w8: Q2.1 v3(1523.6,3378.6) ; v3(1558,3319) 1579,3340 R7.1 R8.2
  Bottom Layer w8: v3(1523.6,3378.6) 1523.6,3353.4 v3(1558,3319)
NetQ2_3: Q2.3 R13.2 | length 118.2
  Top Layer w20: Q2.3 1381.79,3373.21 1392,3363 R13.2
NetQ3_1: Q3.1 R14.1 R16.2 | length 137.1
  Top Layer w20: R16.2 1514,3114 R14.1 1586.39,3113 Q3.1
NetQ3_3: Q3.3 R8.1 | length 98.7
  Top Layer w8: Q3.3 1647.21,3211.21 1661,3225 R8.1
NetQ5_1: Q5.1 R18.2 R19.2 | length 146
  Bottom Layer w8: R19.2@352,2179 R19.2@357.4,2184.4
  Bottom Layer w20: R18.2 350,2179 R19.2@356,2185 ; R19.2 351,2230.39 Q5.1
NetR2_1: R2.1 U2.44 | length 233.4
  Top Layer w8: U2.44 1892.31,1889.35 1972,1969.04 R2.1
NetR3_1: R3.1 U2.31 | length 1320.4
  Top Layer w8: R3.1 1793.62,1177.38 1933.62,1037.38 v3(2067,1037.38) ; U2.31 v3(2142.95,1639.54)
  Bottom Layer w8: v3(2067,1037.38) 2067,1564.42 v3@2142.21,1639.63
NetR5_1: R5.1 U2.30 | length 1457.8
  Top Layer w8: R5.1 1387,1222.38 1781.62,1222.38 1936.62,1067.38 v3(2107,1067.38) ; U2.30 2124.45,1619.86 v3(2144.09,1600.22)
  Bottom Layer w8: v3(2107,1067.38) 2107,1564.26 v3@2142.21,1599.47
NetR10_1: R10.1 U2.20 | length 5745.2
  Top Layer w8: v5@-674,3355 -675,3355 -713,3317 -713,1425.04 v1(-667.89,1379.93) ; v3(1772.16,1320.76) 1927.55,1320.76 1951.37,1344.58 U2.20
  Bottom Layer w8: v5(-673,3355) -607.68,3355 -538.82,3423.86 -538.82,3428.34 -523.58,3443.59 -523.58,3444.99 -439.57,3529 -198,3529 -167,3498 -167,3320.87 -129.13,3283 R10.1 ; v1(-667.89,1379.93) -623,1379.93 -422.48,1179.41 1630.81,1179.41 v3(1772.16,1320.76)
NetR18_1: R18.1 U2.19 | length 2820.5
  Top Layer w8: v3(234.3,1524.01) 278.31,1480 693,1480 v3@721,1452 ; v3(1781.11,1360.16) 1910.39,1360.16 1931.68,1381.46 U2.19
  Bottom Layer w8: 236,2113 213,2113 ; v3@236.95,1521.35 v3(234.3,1524.01) 142,1616.31 142,2068 187,2113 213,2113 ; R18.1 289,2113 213,2113 ; v3(717.6,1452.16) 717.6,1325.97 717,1325.36 816.06,1226.3 1589.96,1226.3 1723.82,1360.16 v3(1781.11,1360.16)
NetR20_2: R20.2 U4.1 U4.2 | length 164.3
  Top Layer w10: U4.2 U4.1 1732.39,2743.29 1767,2777.89 R20.2
NetR21_2: R21.2 U5.7 | length 435
  Top Layer w10: U5.7 v3(1203.26,2517.38) ; v3(1524.76,2552.38) R21.2
  Bottom Layer w10: v3(1203.26,2517.38) 1489.17,2517.38 v3@1523.97,2552.17
NetR22_1: R22.1 R23.1 U4.5 | length 206.1
  Top Layer w30: R23.1 R22.1 1905.51,2542.95 1924.94,2562.38 U4.5
NetR24_2: R24.2 TP3.1 U4.7 | length 275.7
  Top Layer w19.68: U4.7 2057,2662.38 2031.61,2662.38
  Top Layer w30: 2057,2662.38 R24.2 2102,2762.38 TP3.1
NetR25_1: R25.1 U4.6 | length 295.6
  Top Layer w10: R25.1 1907,2766.85 1867,2726.85 1867,2648.15 1902.78,2612.38 U4.6@1967,2612.38
NetR62_1: R62.1 U8.7 | length 388.9
  Top Layer w15: U8.7 1442,692.38 1537,597.38 R62.1
NetR69_1: R69.1 U8.6 | length 364.1
  Top Layer w15: R69.1 1357,642.38 1392,677.38 U8.6
RST: C25.2 R4.2 U2.7 | length 423.4
  Top Layer w8: R4.2 C25.2 1602.87,1427.38 1631.57,1456.08 1631.57,1586.15 1665.28,1619.86 U2.7
RXD1_485: R3.2 U8.1 | length 105
  Top Layer w15: U8.1 R3.2
RXD_233: P4.3 U2.13 | length 3649.1
  Top Layer w8: P4.3 37,45.77 74.25,83.02 429.02,83.02 484,138 531,138 553,160 553,180.56 522,211.56 v3(522,332.38) ; U2.13 1813.57,1402.24 1817.33,1406 v3(1818,1406) ; v3(1853.15,928.45) 2008.26,773.34 v3(2008.26,334.79)
  Bottom Layer w8: v3(522,332.38) 2005.85,332.38 v3(2008.26,334.79) ; v3@1813.26,1405.1 1881.88,1336.48 1881.88,957.18 v3(1853.15,928.45)
SWCLK: SWD1.3 U2.37 | length 497.6
  Top Layer w8: U2.37 2030.11,1835.49 2052,1857.38 2172,1857.38 2202,1827.38 2202,1652.38 2252,1602.38 SWD1.3
SWDIO: SWD1.2 U2.34 | length 184.6
  Top Layer w8: U2.34 2138.22,1698.6 2142,1702.38 v3(2172,1702.38)
  Bottom Layer w8: v3(2172,1702.38) SWD1.2
TXD1_485: R5.2 U8.4 | length 105
  Top Layer w15: U8.4 R5.2
TXD_232: P4.2 U2.12 | length 3718.2
  Top Layer w8: P4.2 -63,32.37 13.43,108.8 408.42,108.8 472,172.38 v3(520.17,172.38) ; v3(1754.52,1502.71) U2.12 ; v3(1805.16,214.98) 1965.85,214.98 2039.69,288.82 2039.69,787.86 v3(1844.18,983.37)
  Bottom Layer w8: v3(520.17,172.38) 562.76,214.98 v3(1805.16,214.98) ; v3@1754.23,1501.73 1754.23,1420.58 1785.65,1389.16 1793.13,1389.16 1844.18,1338.11 v3(1844.18,983.37)
VCC: C5.2 C10.2 C20.1 C26.2 C27.2 C28.2 C29.2 L2.2 R1.2 R4.1 SWD1.1 U2.9 U2.24 U2.36 U2.48 U8.8 VR1.2 VR1.4 | length 7039.1
  Top Layer w8: v3(1489.9,2039.27) L2.2 1489.9,1997.38 R1.2 R1.2@1547.52,1937.38 ; R4.1 1492,1330.48 1507.62,1314.86 1603.74,1314.86 1654.84,1365.95 1654.84,1533.73 1700.83,1579.72 1753.76,1579.72 U2.9 1856.04,1580.49 ; C29.2 1892,1992.38 C28.2 1822,1891.09 1813.57,1882.66 U2.48 1813.57,1622.95 1856.04,1580.49 ; U2.24 2030.11,1514.48 1995.86,1548.74 1887.79,1548.74 1856.04,1580.49 ; U2.36 2088.97,1748.83 2123.2,1783.07 2123.2,1783.58 v3(2152,1812.38)
  Top Layer w10: 2023.67,1353.85 2030.11,1360.29 U2.24
  Top Layer w15: v1(1514.36,681.31) 1514.36,704.01 1492,726.38 U8.8 1550.62,786 1577,812.38 C20.1
  Top Layer w20: 135.97,487.37 135.97,227.11 190.7,172.38 v1@340.01,172.38 ; v1(722.43,129.16) 722.43,176.78 822.65,277 v1(822.65,680.98) ; 2023.67,1353.85 2012,1342.18 C26.2 2017,1257.38 C27.2 2161.85,1257.38 2197.64,1221.59 2197.64,781.1 v1(2097.52,680.98)
  Top Layer w30: v1(2057.52,1985.13) 2232.87,1985.13 2272,1946 SWD1.1
  Top Layer w50: VR1.4 -37.5,487.37 135.97,487.37 C10.2
  Bottom Layer w8: v3(1489.9,2039.27) 1818.85,2039.27 v3(1865.11,1993) 2006.58,1993 2014.45,1985.13 v1(2057.52,1985.13) ; v3(2152,1812.38) 2192,1812.38 2207,1797.38 2267,1797.38 SWD1.1
  Bottom Layer w20: v1(340.01,170.89) 382.21,128.69 v1@722.43,128.69 ; v1(822.65,680.98) v1(2097.52,680.98)
VDD5V: C2.1 C4.2 C13.2 C21.2 C33.2 L1.2 R23.2 U1.4 U4.8 U5.8 VR1.3 | length 5889.9
  Top Layer w10: v1(1754.57,2385.58) 1767.12,2398.13 R23.2
  Top Layer w30: v1(1025.85,2386.47) 1088.08,2386.47 1140.62,2439.01 U5.8@1140.62,2457.97 ; C21.2 C33.2 2032,2712.77 2031.61,2712.38
  Top Layer w50: VR1.3 -298.6,386.83 -398.05,287.38 C13.2 C2.1 C4.2 L1.2 -339.83,815.53 -201.83,953.52 U1.4 ; v1(1036.92,954.58) 1036.92,1482.61 v1(1162.64,1608.33) ; v1(1916.19,2712.38) U4.8 2031.61,2712.38
  Bottom Layer w50: v1(4.27,954.58) v1(1036.92,954.58) ; v1(1162.64,1608.33) 1162.64,1810.33 1025.85,1947.12 v1(1025.85,2386.47) 1834.41,2386.47 1915.4,2467.46 v1@1915.4,2711.21
VDD12V: C3.2 C8.2 C9.2 D1.2 Q15.2 U1.1 | length 941.8
  Top Layer w50: Q15.2 -84,1894 67,1743 D1.2@67,1524.01 ; D1.2 54.75,1374.25 90,1339 C3.2@177,1339 ; U1.1 C3.2@177,1339 ; C3.2@182,1339 C3.2@177,1339
VDD12V1: C1.1 D2.2 D4.2 J1.4 J1.5 J1.6 K1.86 K2.86 Q2.2 Q15.3 R7.2 U5.1 U5.2 | length 5034
  Top Layer w10: R7.2 v3(1723,3340)
  Top Layer w20: v4(1115,2928) 1184,2928 v4(1260,3004) ; Q2.2@1473,3458.19 v1(1473,3502.21)
  Bottom Layer w20: D2.2 291,3536.31 336,3581.31 749,3581.31 ; D4.2 296.39,2503.61 484.09,2315.91 K2.86 817.91,2315.91 1152,2650 1341,2650 1390,2699 1390,2816 1341,2865 1341,3006 ; 746.8,3579.1 749,3581.31 ; K1.86 876.09,2963.91 912,2928 v4(1115,2928) ; v4(1260,3004) 1339,3004 1341,3006 ; 1473,3458.19 1473,3471 ; v3(1723,3340) 1723,3386 1697,3412 1563.21,3412 v1(1473,3502.21) ; 749,3581.31 1436.17,3581.31 1473,3544.48 v1(1473,3502.21) ; 1341,3006 1341,3300 1473,3432 1473,3471 ; 1473,3471 v1(1473,3502.21)
  other v2: -368,2006 220,2051 908,2058 452,2070 665.48,2087.38 525.08,2094.78 812,2094.78 600,2151 107,2174 -264.91,2183.6 -418,2187.38 527,2208.95 812,2211.08 923,2218 -124.7,2247.75 -238,2267.38 -333,2282.38 1186.87,2288.52 1335.46,2291.38
VO+: K1.88 K2.88 U5.3 U5.4
  other v2: 795,2438 716,2439 823,2496 654,2513 945,2574 919,2664 1015.43,2729.53 1170.69,2733.34 935,2759 1282,2808 1185,2815 699,2832 1037,2836.21 859,2873 942,3005 794,3084
pads on no net: U2.0 U2.3 U2.4 U2.11 U2.14 U2.15 U2.16 U2.17 U2.21 U2.22 U2.25 U2.26 U2.27 U2.28 U2.29 U2.33 U2.38 U2.39 U2.40 U2.41 U2.42 U2.43 U2.45 U2.46

## Polygon pours and split planes (outlines as drawn)
GND on Top Layer "Top Layer-No Net" (solid, remove dead copper, pour order 7): -870.15,-603.63 -848.96,-582.45 910.16,-603.63 910.16,24.63 1725.04,24.63 1725.04,-247.21 1907.56,-247.21 1907.56,210.16 3135.31,210.16 3202.41,3092.92 2694,3601.32 2609.27,3686.06 -944.29,3686.06 -944.29,-492.42 -838.37,-598.33
VDD12V1 on Top Layer "Mechanical 1-No Net" (solid, pour order 6): 1432,2531 1250,2531 1234,2515 1235,2514 1235,2481 1235,2479 1082,2326 1051,2295 605,2295 -93,2295 -110,2278 -246,2142 -246,2084 -246,2011.22 -204.33,1969.56 -194.21,1959.43 -127.43,1959.43 -5.68,1959.43 47.11,1906.65 182.76,1771 835,1771 1007.09,1771 1076.01,1839.92 1094,1857.91 1094,2086 1094,2096 1136,2138 1136.11,2138.11 1234.54,2138.11 1392.11,2138.11 1432,2178 1452,2198 1452,2459 1452,2511 1432,2531
VO+ on Top Layer "Mechanical 1-No Net" (solid, remove dead copper, pour order 1000): 648,3346 836,3346 878,3304 901,3281 901,3176 901,3143 922,3122 1004,3040 1084,3040 1127,3040 1270,2897 1407,2760 1407,2710 1407,2549 1409,2547 1402,2540 1243,2540 1042.25,2540 1031,2528.75 901.25,2399 667,2399 653.84,2399 630.86,2421.99 620,2432.84 620,2474 620,3318 648,3346
GND on Bottom Layer "Top Layer-No Net" (solid, remove dead copper, pour order 8): -780.59,-610.93 -759.41,-589.75 999.71,-610.93 999.71,17.33 1814.59,17.33 1814.59,-254.51 2076.59,-254.51 2076.59,202.86 3224.86,202.86 3291.96,3085.62 2783.56,3594.03 2698.82,3678.76 -854.74,3678.76 -854.74,-499.71 -748.82,-605.63
VO+ on Bottom Layer "Mechanical 1-No Net" (solid, remove dead copper, pour order 1001): 648,3346 836,3346 878,3304 901,3281 901,3176 901,3143 922,3122 1004,3040 1084,3040 1127,3040 1270,2897 1407,2760 1407,2710 1407,2549 1409,2547 1402,2540 1243,2540 1042.25,2540 1031,2528.75 901.25,2399 667,2399 653.84,2399 630.86,2421.99 620,2432.84 620,2474 620,3318 648,3346

## Keep-outs
Keep-Out Layer:
  circle w10: c2278.19,3521.96 r140.19
  circle w10: c-676,3520 r140.19
  circle w10: c-674,-229 r140.19
  circle w10: c1794.07,3207.38 r86.61
  circle w10: c443.07,1894 r86.61
  circle w10: c1713.07,1031 r86.61
  lines w5: -766.9,-317.22 -766.9,3608.81 2371,3608.81 2371,-317.22 -766.9,-317.22

## Other copper
Top Layer:
  rectangle net VDD12V1: 1187,2131 1340,2240
  rectangle net GND: 1127,3268 1216,3388
  rectangle net GND: -663,1462 -446,1506
  rectangle net GND: -673,1617 -445,1668
  rectangle net GND: -593,1395 -530,1860
  rectangle net GND: -672,1774 -410,1822
  rectangle net NetC32_2: 2068.69,-302.62 2357,387.38
  rectangle net GND: 375.29,993.64 870.87,1068.03
  rectangle net GND: 552.36,751.6 679.13,1295.39
  rectangle net NetJ3_1: -55,2265.48 217.07,2434
  rectangle net VO+: 1301,2547 1409,2662
  rectangle net VO+: 744,2540 799,2718
  rectangle net VO+: 660,2600 883,2650
  rectangle net VO+: 746,3205 799,3335
  rectangle net VO+: 663,3249 874,3290
  region net VDD12V1: 1235,2482 1051,2298 1051,2295 1393,2295 1451,2353 1451,2512 1432,2531 1250,2531 1234,2515 1234,2482 1235,2481
  pour cut-out: 497,1963 486,1974 405,1974 362,1931 362,1855 399,1818 488,1818 526,1856 526,1930 482,1974
  region net NetD6_2: 1012,3257.38 1107,3257.38 1112,3252.38 1197,3252.38 1207,3242.38 1207,3182.38 1187,3162.38 1027,3162.38 1012,3177.38
  region net VDD12V1: -78,2312.38 -78,1957 -358.38,1957 -438,1877.38 -643,1877.38 -643,2312.38
  region net VDD12V1: 1452,2194.05 1383,2125 1208,2125 1094,2011 1094,1942.55 992.45,1942.55 976,1959 1025.85,2008.85 1025.85,2262 1388,2262 1452,2198
  region net NetJ3_4: -273,3510 -168.5,3265.86 211.49,3159.46 214.32,2932.04 188.1,2919 -535.69,2919 -535.69,3426.31 -453,3509
  region net NetJ3_1: 215,2532.48 215,2409 196,2390 -17,2349 -495,2349 -583,2467.38 -583,2891 -163.63,2891 26.01,2554.76
  region net NetD6_2: 546,2550 591,2595 591,3314 648,3371 820,3371 910,3281 910,3160 1013,3057 1075,3057 1091,3073 1091,3540 1041,3590 398,3590 276,3468 276,2631 357,2550
Bottom Layer:
  rectangle net GND: -672,1461 -434,1503
  rectangle net GND: -667,1617 -447,1659
  rectangle net GND: -678,1779 -436,1821
  rectangle net GND: -578,1409 -532,1823
  rectangle net NetJ3_1: -51,2274 214,2438
  rectangle net VO+: 737,3188 798,3337
  rectangle net VO+: 656,3245 872,3294
  rectangle net VO+: 736,2542 805,2720
  rectangle net VO+: 664,2599 886,2645
  region net NetJ3_4: -275,3510 -161,3252 213.63,3147.11 216.4,2924 -516,2924 -516,3422 -429.76,3508.24
  region net NetD6_2: 1012,3257.38 1107,3257.38 1112,3252.38 1197,3252.38 1207,3242.38 1207,3182.38 1187,3162.38 1027,3162.38 1012,3177.38
  region net VDD12V1: -78,2312.38 -78,2016 -304.38,2016 -443,1877.38 -643,1877.38 -643,2312.38
  region net NetJ3_1: 215,2532.48 215,2409 196,2390 -17,2349 -495,2349 -583,2467.38 -583,2891 -163.63,2891 26.01,2554.76
  region net NetD6_2: 546,2550 591,2595 591,3314 648,3371 820,3371 910,3281 910,3160 1013,3057 1075,3057 1091,3073 1091,3540 1090,3541 362,3541 362,2550

## Silkscreen, mask and mechanical layers (free items; w line width, h text height)
Top Overlay:
  lines w5: 1354,3124 1375,3124 1408,3091
  text "+" at -164.5,3276.67 h40
  text "+" at -150.53,3122.79 h40
  text "+" at -157,2965.28 h40
  text "-" at -169,2827.47 h40
  text "-" at -169,2674.38 h40
  text "-" at -169,2525.79 h40
  text "12V" at -326.84,2223.83 h40
  text "12V" at -326.84,2078.21 h40
  text "12V" at -328,1934.58 h40
  text "GND" at -343.24,1769.63 h40
  text "GND" at -342,1536 h40
  text "GND" at -340,1423 h40
  text "B" at 325,-19 h50
  text "A" at 455,-22 h50
Bottom Overlay:
  circle w10: c1942.39,3207.38 r86.61
  circle w10: c617.39,1894 r86.61
  rectangle: 367.66,499.46 1220.68,1347.71
  lines w5: 2086,3425.2 1377.95,3425.2 1377.95,2011 0,2011 0,0 2086.61,0 2086.61,3425.2
  text "GND" at -421,132 h40 r90
  text "TXD" at -331,132 h40 r90
  text "RXD" at -232,126 h40 r90
  text "485_B" at 249,-47 h40 r90
  text "485_A" at 589,-64 h40 r90
  text "ELE MODULE V1.3  20211029" at 1990,-177 h80
Bottom Solder:
  region: 215,2532.48 215,2409 -96.71,2349 -495,2349 -583,2467.38 -583,2891 -163.63,2891 26.01,2554.76
  region: -275,3510 -161,3252 213.63,3147.11 216.4,2924 -516,2924 -516,3422 -429.76,3508.24
  region: 546,2550 591,2595 591,3314 648,3371 820,3371 910,3281 910,3160 1013,3057 1075,3057 1091,3073 1091,3540 1090,3541 362,3541 362,2550
  region: 687,2903 1243,2903 1349,2797 1349,2678 1128,2678 851,2401 670,2401 623,2448 623,2839
Mechanical 1:
  circle w10: c1713.07,1031 r86.61
  circle w10: c443.07,1894 r86.61
  circle w10: c1795.07,3207.38 r86.61
  lines w5: -773,-322.62 2376.61,-322.62 2376.61,3614.39 -773,3614.39 -773,-322.62

## Text inside footprints (layer, text, board x,y; h text height)
C1: Top Overlay "+" at 1229,2154 h60 r90
C2: Top Overlay "+" at -554.62,505.09 h50